# Altium PCB PCB2.PcbDoc
Units mil, origin at the board's own origin, x right, y up, seen from the top; angles counter-clockwise.
Board outline 4285 x 3120 mil, 4 copper layers (Top Layer, Layer 1, Layer 2, Bottom Layer), stack 64.008 mil thick; 26 components, 31 nets, 180 pads, 40 vias.
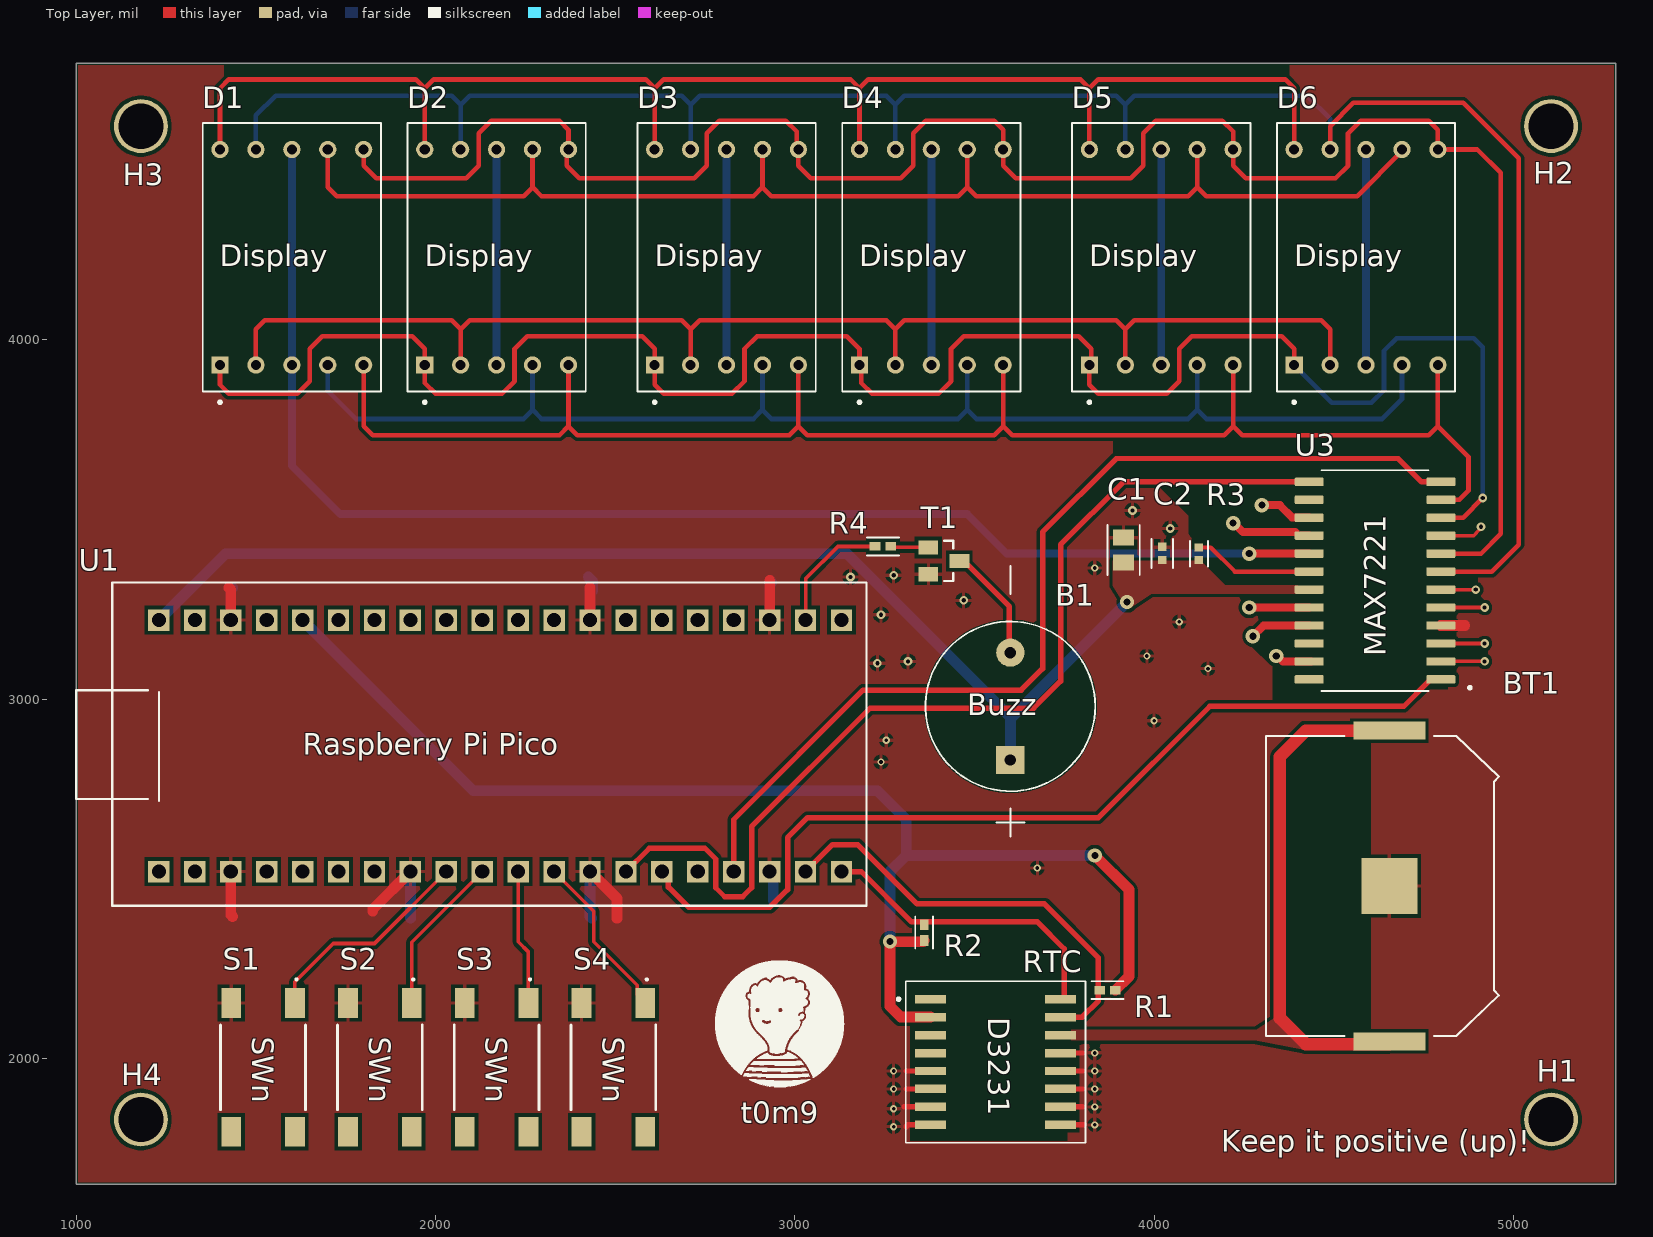
[diagram p0: Top Layer view]
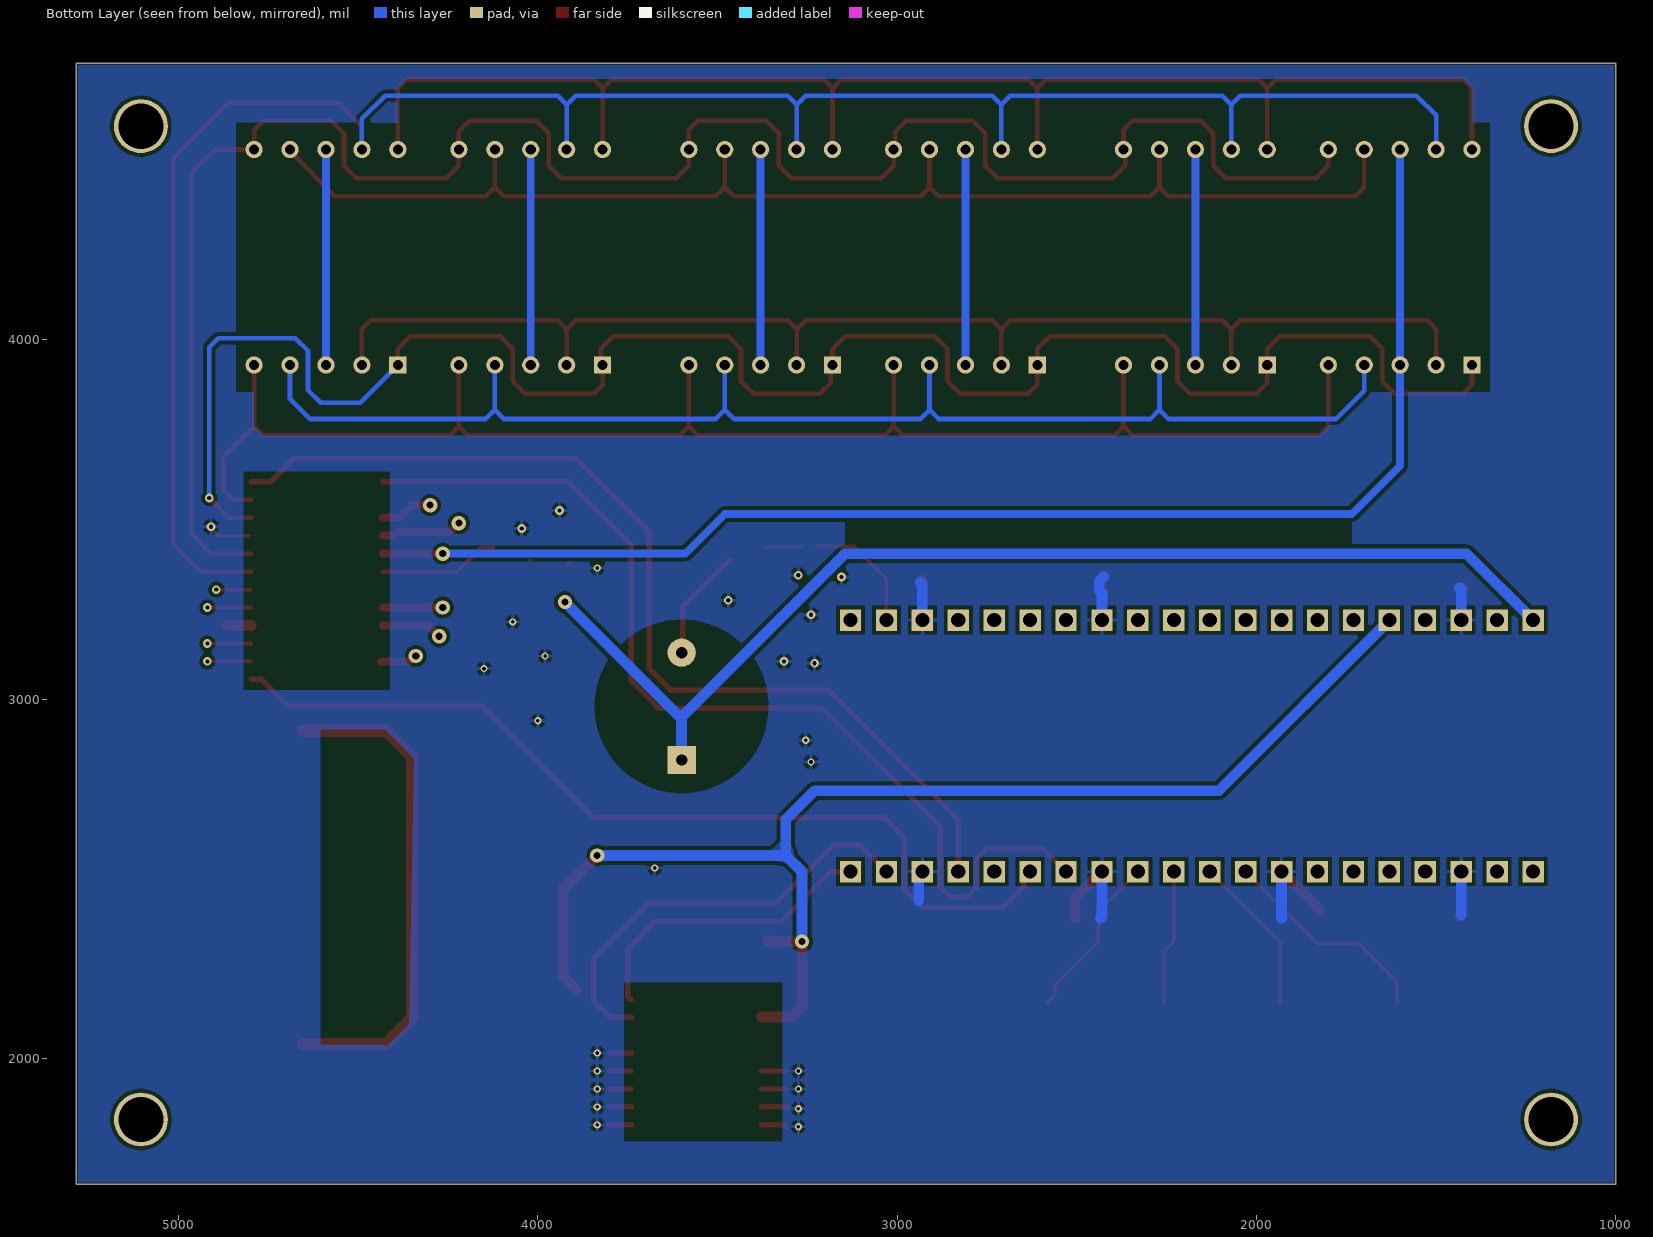
[diagram p1: Bottom Layer view, seen from below]
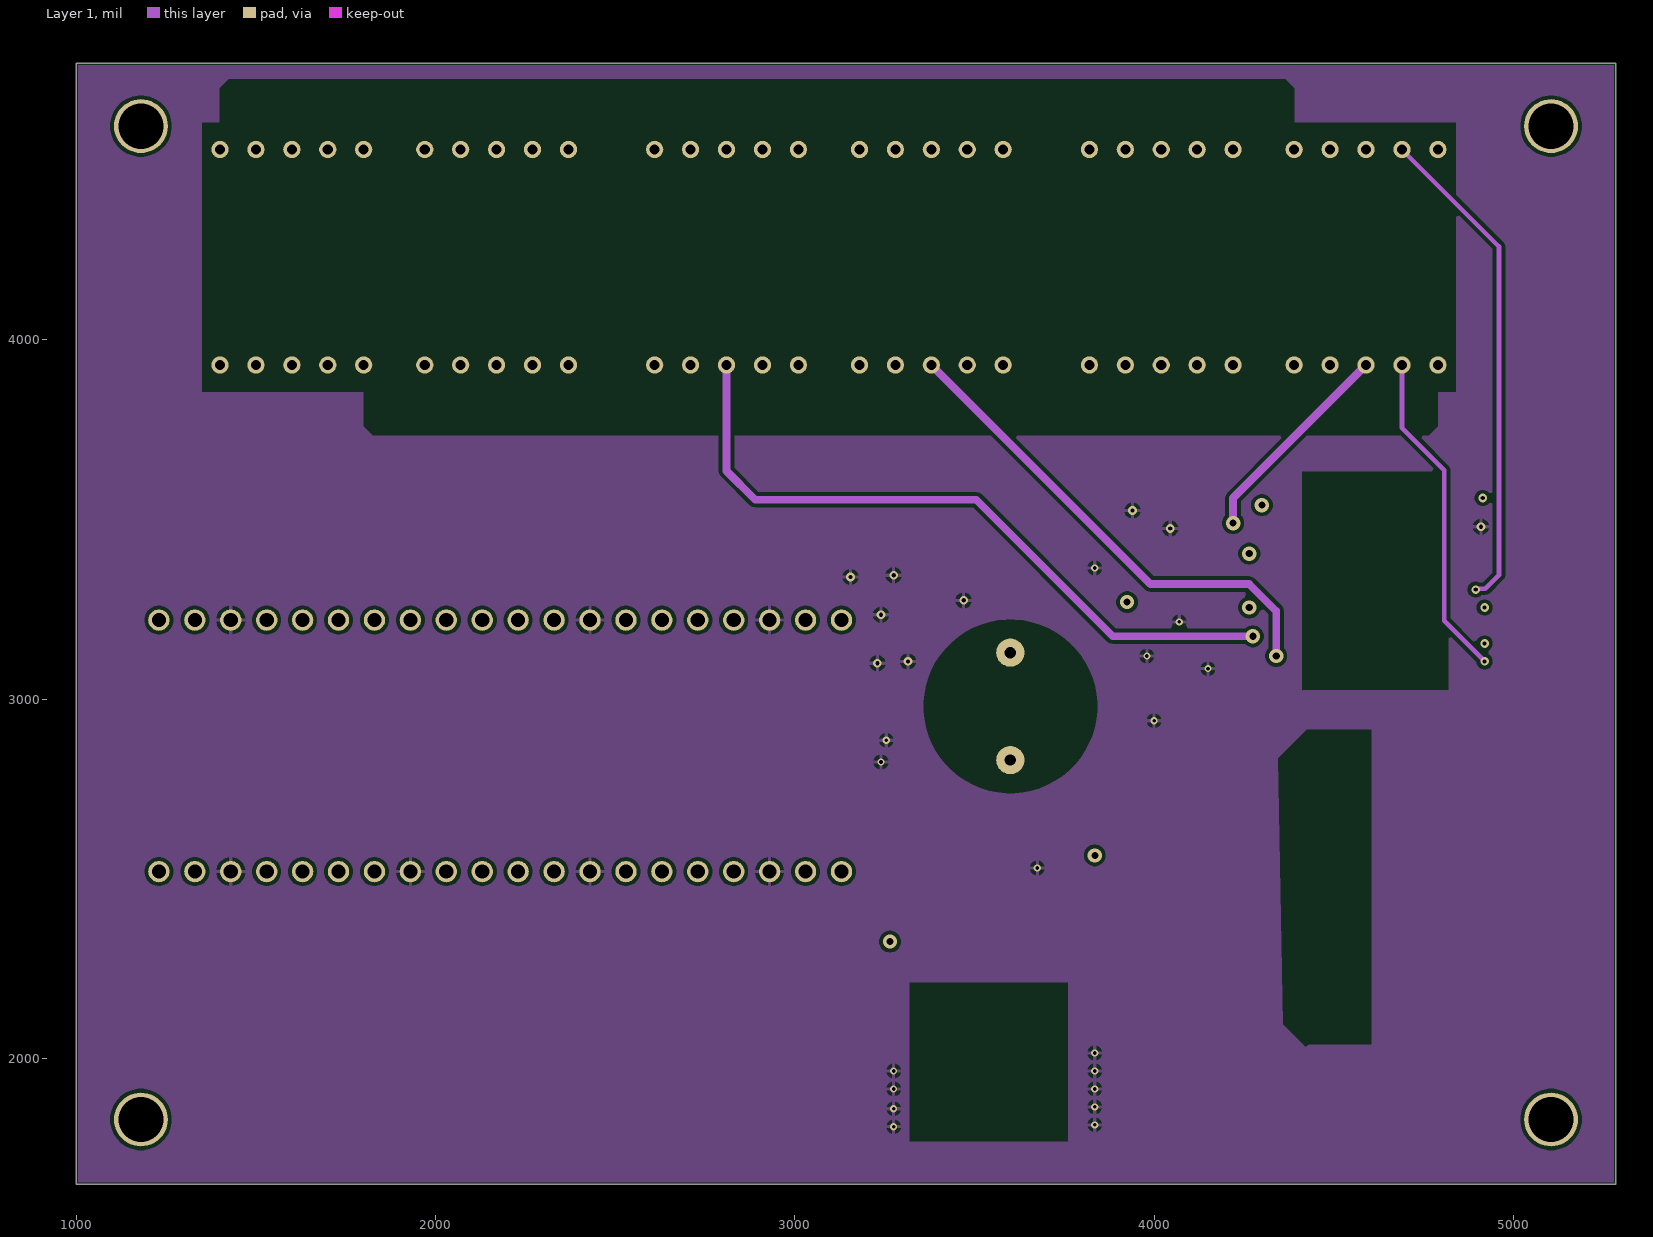
[diagram p2: Layer 1]
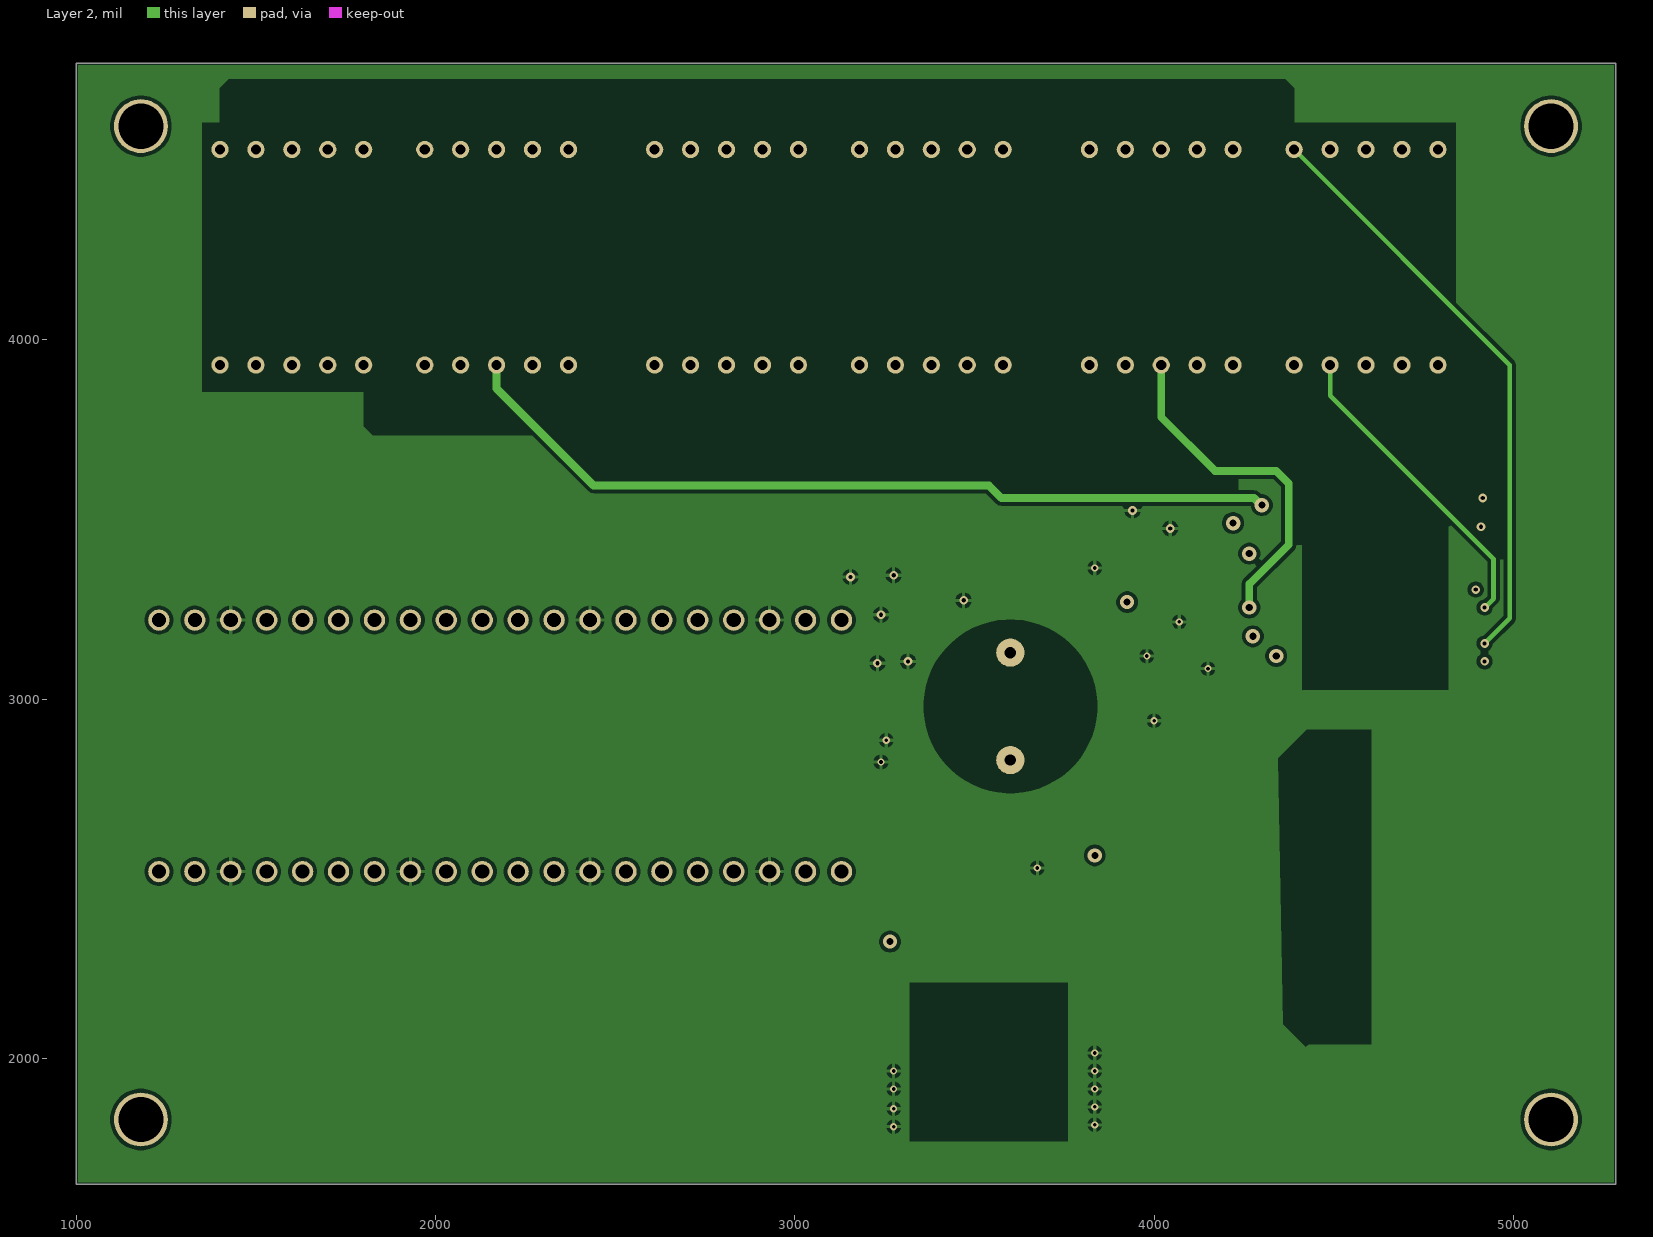
[diagram p3: Layer 2]

## Layer stack, top to bottom
Top Solder: solder mask 0.4, Solder Resist, Dk 3.5
Top Layer: signal copper 1.378
Dielectric 2: prepreg 8.2835, PP-006, Dk 4.1
Layer 1: signal copper 1.378
Dielectric 1: dielectric 41.9291, FR-4, Dk 4.8
Layer 2: signal copper 1.378
Dielectric 3: prepreg 8.2835, PP-006, Dk 4.1
Bottom Layer: signal copper 1.378
Bottom Solder: solder mask 0.4, Solder Resist, Dk 3.5

## Board outline
1000,1650 1000,4770 5285,4770 5285,1650 1120,1650

## Design rules (kind name [scope] priority, off if disabled: settings)
Clearance Clearance_1 [InNamedPolygon('9')] p1: gap=10 ignorepadtopadclearanceinfootprint=FALSE except(15: Arc-Poly Track-Poly SMDPad-Poly THPad-Poly Via-Poly Fill-Poly Poly-Poly)
Clearance [All] p2: gap=10 ignorepadtopadclearanceinfootprint=FALSE
PolygonConnect PolygonConnect_15 [InNetClass('All Nets') vs IsNamedPolygon('4')] p1: connectstyle=Direct reliefconductorwidth=10 reliefentries=4 polygonreliefangle="90 Angle" airgapwidth=10
PolygonConnect PolygonConnect_14 [All vs IsNamedPolygon('4')] p2: connectstyle=Direct reliefconductorwidth=10 reliefentries=4 polygonreliefangle="90 Angle" airgapwidth=10
PolygonConnect PolygonConnect_13 [All vs IsNamedPolygon('9')] p3: connectstyle=Direct reliefconductorwidth=10 reliefentries=4 polygonreliefangle="90 Angle" airgapwidth=10
PolygonConnect PolygonConnect_12 [All vs IsNamedPolygon('7')] p4: connectstyle=Direct reliefconductorwidth=10 reliefentries=4 polygonreliefangle="90 Angle" airgapwidth=10
PolygonConnect PolygonConnect_11 [All vs IsNamedPolygon('4')] p5: connectstyle=Direct reliefconductorwidth=10 reliefentries=4 polygonreliefangle="90 Angle" airgapwidth=10
PolygonConnect PolygonConnect_10 [All vs IsNamedPolygon('3')] p6: connectstyle=Relief reliefconductorwidth=10 reliefentries=4 polygonreliefangle="90 Angle" airgapwidth=10
PolygonConnect PolygonConnect_9 [All vs IsNamedPolygon('1')] p7: connectstyle=Direct reliefconductorwidth=10 reliefentries=4 polygonreliefangle="90 Angle" airgapwidth=10
PolygonConnect PolygonConnect_8 [All vs IsNamedPolygon('9')] p8: connectstyle=Relief reliefconductorwidth=10 reliefentries=4 polygonreliefangle="90 Angle" airgapwidth=10
PolygonConnect PolygonConnect_7 [All vs IsNamedPolygon('9')] p9: connectstyle=Direct reliefconductorwidth=10 reliefentries=4 polygonreliefangle="90 Angle" airgapwidth=10
PolygonConnect PolygonConnect_6 [All vs IsNamedPolygon('9')] p10: connectstyle=Relief reliefconductorwidth=10 reliefentries=4 polygonreliefangle="90 Angle" airgapwidth=10
PolygonConnect PolygonConnect_5 [All vs IsNamedPolygon('9')] p11: connectstyle=Direct reliefconductorwidth=10 reliefentries=4 polygonreliefangle="90 Angle" airgapwidth=10
PolygonConnect PolygonConnect_4 [All vs IsNamedPolygon('3')] p12: connectstyle=Direct reliefconductorwidth=10 reliefentries=4 polygonreliefangle="90 Angle" airgapwidth=10
PolygonConnect PolygonConnect_3 [All vs IsNamedPolygon('3')] p13: connectstyle=Direct reliefconductorwidth=10 reliefentries=4 polygonreliefangle="90 Angle" airgapwidth=10
PolygonConnect PolygonConnect_2 [All vs IsNamedPolygon('3')] p14: thpad.connectstyle=Relief thpad.reliefconductorwidth=10 thpad.reliefentries=4 thpad.polygonreliefangle="90 Angle" thpad.airgapwidth=10 smdpad.connectstyle=Relief smdpad.reliefconductorwidth=10 smdpad.reliefentries=4 smdpad.polygonreliefangle="90 Angle" smdpad.airgapwidth=10 via.connectstyle=Direct via.reliefconductorwidth=10 via.reliefentries=4 via.polygonreliefangle="90 Angle" via.airgapwidth=10
PolygonConnect PolygonConnect_1 [All vs IsNamedPolygon('3')] p15: thpad.connectstyle=Direct thpad.reliefconductorwidth=10 thpad.reliefentries=4 thpad.polygonreliefangle="90 Angle" thpad.airgapwidth=10 smdpad.connectstyle=Direct smdpad.reliefconductorwidth=10 smdpad.reliefentries=4 smdpad.polygonreliefangle="90 Angle" smdpad.airgapwidth=10 via.connectstyle=Relief via.reliefconductorwidth=10 via.reliefentries=4 via.polygonreliefangle="90 Angle" via.airgapwidth=10
PolygonConnect [All] p16: connectstyle=Relief reliefconductorwidth=10 reliefentries=4 polygonreliefangle="90 Angle" airgapwidth=10
RoutingVias [All] p1: holewidth=100 width=100 viastyle="Through Hole" minholewidth=10 minwidth=20 maxholewidth=200 maxwidth=250
SolderMaskExpansion [All] p1: expansion=4 istentingtop=FALSE
SupplyNets "Schematic Supply Nets" [InNet('GND')] p1: voltage=0.000
Width [All] p1: maxlimit=50 minlimit=10 preferedwidth=15 minimp=50.000000 maximp=50.000000 favimp=50.000000
30 further rules are at their usual default settings.

## Components (designator, comment, footprint, x,y, rotation, side; value= is the part's Value field where it differs from the comment)
B1 "CMI-1295-0585T" CMI-1295-0585T 3600,2980 r90 top
BT1 "Keystone 3034 BH" BAT_3034TR 4655,2480 r270 top
C1 "Electrolitic Capacitor 10uF" CAPC2012X145N 3915,3415 r90 top
C2 "UMK105B7104KVHF" UMK105B7104KVHF 4022.8,3405.46 r90 top
D1 "LED" LED_INND-TS56RAB 1600,4230 r90 top
D2 "LED" LED_INND-TS56RAB 2170,4230 r90 top
D3 "LED" LED_INND-TS56RAB 2810,4230 r90 top
D4 "LED" LED_INND-TS56RAB 3380,4230 r90 top
D5 "LED" LED_INND-TS56RAB 4020,4230 r90 top
D6 "LED" LED_INND-TS56RAB 4590,4230 r90 top
H1 "Tooling Hole" "TOOLING HOLE" 5105,1830 r0 top
H2 "Tooling Hole" "TOOLING HOLE" 5105,4595 r0 top
H3 "Tooling Hole" "TOOLING HOLE" 1180,4595 r0 top
H4 "Tooling Hole" "TOOLING HOLE" 1180,1830 r0 top
R1 "10k" "MR04X102 JTL" 3870,2190 r0 top
R2 "10k" "MR04X102 JTL" 3360,2350 r270 top
R3 "CRCW040221K0FKEDC" CRCW040221K0FKEDC 4125,3405 r270 top
R4 "MR04X102 JTL" "MR04X102 JTL" 3245,3425 r0 top
RTC "DS3231 RTC" "DS3231 RTC" 3558.9,1990 r270 top
S1 "TS04-66-70-BK-260-SMT" TS04-66-70-BK-260-SMT 1520,1975 r270 top
S2 "TS04-66-70-BK-260-SMT" TS04-66-70-BK-260-SMT 1845,1975 r270 top
S3 "TS04-66-70-BK-260-SMT" TS04-66-70-BK-260-SMT 2170,1975 r270 top
S4 "TS04-66-70-BK-260-SMT" TS04-66-70-BK-260-SMT 2495,1975 r270 top
T1 "2N7002" 2N7002 3415,3385 r270 top
U1 "RASPBERRY_PI_PICO" RASPBERRY_PI_PICO 2100,2875 r90 top
U3 "MAX7221" MAX7221 4615,3330 r180 top

## Footprints (in the part's own frame and the unit in brackets; to place one, negate y for a bottom-side part, rotate by r counter-clockwise, add the part's x,y. Pads: shape width x height; smd on the part's side, far side on the other; paste and mask are expansions set on the pad)
2N7002 [mm]
  rect 1x1.4 smd: 1(-0.95,-1.1) 2(0.95,-1.1) 3(0,1.1)
  silkscreen extent -1.42,0 1.42,0.66, body extent -1.46,-1.18 1.46,1.18, height 1.12
BAT_3034TR [mm]
  rect 1.27x5.08 smd: 1(-10.985,0) 1(10.985,0)
  rect 3.96x3.96 smd paste-3: 2(0,0)
  silkscreen extent -10.61,-8.73 10.61,7.74, body extent -11.62,-7.72 11.62,8.76, height 4.06
CAPC2012X145N [mm]
  rect 1.15x1.47 smd: 1(-0.88,0) 2(0.88,0)
  silkscreen extent -1.78,-1.14 1.78,1.14, body extent -1,-0.63 1,0.63, height 1.45
CMI-1295-0585T [mm]
  round 2 hole 0.8: N(3.8,0)
  rect 2x2 / inner round 2 / far side rect 2x2 hole 0.8: P(-3.8,0)
  silkscreen extent -9.22,-6 9.92,6, body extent -6,-6 6,6, height 9
CRCW040221K0FKEDC [mm]
  rect 0.56x0.6 smd: 1(-0.435,0) 2(0.435,0)
  silkscreen extent -0.89,-0.64 0.89,0.64, body extent -0.5,-0.25 0.5,0.25, height 0.35
"DS3231 RTC" [mm]
  rect 0.6x2.2 smd: 1(-4.445,-4.6) 2(-3.175,-4.6) 3(-1.905,-4.6) 4(-0.635,-4.6) 5(0.635,-4.6) 6(1.905,-4.6) 7(3.175,-4.6) 8(4.445,-4.6) 9(4.445,4.6) 10(3.175,4.6) 11(1.905,4.6) 12(0.635,4.6) 13(-0.635,4.6) 14(-1.905,4.6) 15(-3.175,4.6) 16(-4.445,4.6)
  silkscreen extent -5.72,-6.96 5.72,6.35, body extent -5.15,-5.16 5.15,5.16, height 2.65
LED_INND-TS56RAB [mm]
  rect 1.218x1.218 / inner round 1.218 / far side rect 1.218x1.218 hole 0.71: 1(-7.62,5.08)
  round 1.218 hole 0.71: 2(-7.62,2.54) 3(-7.62,0) 4(-7.62,-2.54) 5(-7.62,-5.08) 6(7.62,-5.08) 7(7.62,-2.54) 8(7.62,0) 9(7.62,2.54) 10(7.62,5.08)
  silkscreen extent -10.35,-6.3 9.5,6.3, body extent -9.5,-6.3 9.5,6.3, height 8
MAX7221 [mm]
  rrect25% 2.05x0.59 smd: 1(-4.655,6.985) 2(-4.655,5.715) 3(-4.655,4.445) 4(-4.655,3.175) 5(-4.655,1.905) 6(-4.655,0.635) 7(-4.655,-0.635) 8(-4.655,-1.905) 9(-4.655,-3.175) 10(-4.655,-4.445) 11(-4.655,-5.715) 12(-4.655,-6.985) 13(4.655,-6.985) 14(4.655,-5.715) 15(4.655,-4.445) 16(4.655,-3.175) 17(4.655,-1.905) 18(4.655,-0.635) 19(4.655,0.635) 20(4.655,1.905) 21(4.655,3.175) 22(4.655,4.445) 23(4.655,5.715) 24(4.655,6.985)
  silkscreen extent -6.81,-7.8 3.8,7.8, body extent -5.16,-7.7 5.16,7.7, height 2.65
"MR04X102 JTL" [mm] "1k 0402"
  rect 0.75x0.6 smd: 1(-0.55,0) 2(0.55,0)
  silkscreen extent -1.14,-0.64 1.14,0.64, body extent -0.5,-0.25 0.5,0.25, height 0.4
RASPBERRY_PI_PICO [mil]
  rect 59.37x59.37 / inner round 59.37 / far side rect 59.37x59.37 hole 39.37: 3V3(345,470) 3V3_EN(345,570) ADC_VREF(345,370) AGND(345,170) GND(345,670) GND2(345,-330) GND3(345,-830) GND4(-355,670) GND5(-355,170) GND6(-355,-330) GND7(-355,-830) GP0(-355,870) GP1(-355,770) GP2(-355,570) GP3(-355,470) GP4(-355,370) GP5(-355,270) GP6(-355,70) GP7(-355,-30) GP8(-355,-130) GP9(-355,-230) GP10(-355,-430) GP11(-355,-530) GP12(-355,-630) GP13(-355,-730) GP14(-355,-930) GP15(-355,-1030) GP16(345,-1030) GP17(345,-930) GP18(345,-730) GP19(345,-630) GP20(345,-530) GP21(345,-430) GP22(345,-230) GP26_A0(345,-30) GP27_A1(345,70) GP28_A2(345,270) RUN(345,-130) VBUS(345,870) VSYS(345,770)
  silkscreen extent -450,-1100 450,1100, body extent -418,-1084 408,975, height 249
"TOOLING HOLE" [mm]
  round 3.81 hole 3.2: 10(0,0)
TS04-66-70-BK-260-SMT [mm] "SMD button"
  rect 2.1x1.4 smd: 1(-4.55,2.25) 2(-4.55,-2.25) 3(4.55,2.25) 4(4.55,-2.25)
  silkscreen extent -6.27,-3 3,3, body extent -4.97,-3 5.03,3, height 7
UMK105B7104KVHF [mm]
  rect 0.6x0.62 smd: 1(-0.46,0) 2(0.46,0)
  silkscreen extent -1.02,-0.76 1.02,0.76, body extent -0.5,-0.28 0.5,0.27, height 0.5

## Part data
B1: "Buzzer", ComponentLink1Description="New link"
C1: "CGA4J1X7R0J106K125AC  /  / 10u 6.3V 0805"
C2: "0.1uF"
D1 D2 D3 D4 D5 D6: "VQB-71"
R1 R2: library part ESR01MZPF1002
R3: "21k"
R4: "1k"
S1 S2 S3 S4: "50mA 12VDC", ComponentLink1Description="New link", ComponentLink1URL=https://www.mouser.pl/ProductDetail/Same-Sky/TS04-66-70-BK-260-SMT?qs=A6eO%252BMLsxmRC7sCjYvfBWA%3D%3D&mgh=1&vip=1&utm_id=20540008314&utm_source=google&utm_medium=cpc&utm_marketing_tactic=emeacorp&gad_source=1&gad_campaignid=20549663743&gbraid=0AAAAADn_wf3exhVZw2lg0M8R4AHAX7JAt&gclid=Cj0KCQjw9JLHBhC-ARIsAK4PhcrY2_4ccHUHvV6ZUo_WOC_S4ttDTQDRDZOP9uDgYmQccfZ3msk1KAwaApw5EALw_wcB
T1: "Transistor", ComponentLink1Description="New link", ComponentLink1URL=https://eu.mouser.com/ProductDetail/Vishay-Siliconix/2N7002-T1-E3?qs=jcx%252B0HVgj2Z1J1ac9Hiotg%3D%3D&utm_id=22436684815&utm_source=google&utm_medium=cpc&utm_marketing_tactic=emeacorp&gad_source=1&gad_campaignid=22426729329&gbraid=0AAAAADn_wf1Do64Tw2aIrXe33zOqTl_Om&gclid=Cj0KCQjwl5jHBhDHARIsAB0Yqjw-ZGSpO3dx2dSvGBMt7_r144avYgoIM5zojlC5lH09VKLSqUlBBdAaArJKEALw_wcB
U1: "Raspberry Pi Board, Arm Cortex-M0+; Core Architecture:Arm; Core Sub-Architecture:Cortex-M0+; Kit Contents:Raspberry Pi Pico Board; No. Of Bits:32Bit; Silicon Core Number:Rp2040; Silicon Manufacturer:Raspberry Pi", Package=None, Check_prices=https://www.snapeda.com/parts/RASPBERRY%20PI%20PICO/Raspberry+Pi/view-part/?ref=eda, MF="Raspberry Pi", MP="RASPBERRY PI PICO", SnapEDA_Link=https://www.snapeda.com/parts/RASPBERRY%20PI%20PICO/Raspberry+Pi/view-part/?ref=snap

## Via types
v1: diameter 20, hole 10, Top Layer to Bottom Layer, 17 vias
v2: diameter 24, hole 12, Top Layer to Bottom Layer, 14 vias
v3: diameter 40, hole 20, Top Layer to Bottom Layer, 6 vias
v4: diameter 39.37, hole 19.68, Top Layer to Bottom Layer, 3 vias

## Nets (pads, with @x,y where several pads share a name; then routed paths per layer and width w, separated by ;. In a path a pad name is that pad's centre, name@x,y a point inside that pad or via, vN(x,y) a via of type N, cw(c..) or ccw(c..) an arc to the next point about the centre after c; other vN are vias at no path point)
3V3: R1.2 R2.2 RTC.2 U1.3V3 | length 3626.5
  Top Layer w10: 3266.69,2143.31 3267.5,2142.5
  Top Layer w30: R2.2 3356.65,2325 v4(3265,2325) 3265,2145 3267.5,2142.5 3295,2115 RTC.2 ; v4(3835,2565) 3930,2470 3930,2228.35 R1.2
  Bottom Layer w30: U1.3V3 2105,2745 3230,2745 3310,2665 3310,2565 ; v4(3265,2325) 3265,2520 3310,2565 ; v4(3835,2565) 3310,2565
BUZZER: R4.1 U1.GP17 | length 345.6
  Top Layer w10: U1.GP17 3030,3335 3120,3425 R4.1
CONFIRM: S3.1 U1.GP8 | length 377.7
  Top Layer w10: U1.GP8 2230,2325 2258.58,2296.42 S3.1
CYCLE_MODES: S4.1 U1.GP9 | length 470.9
  Top Layer w10: U1.GP9 2440,2410 2440,2325 2561.02,2203.98 2561.02,2176.69 S4.1
DIG_0: D1.3 D1.8 U3.17 | length 3813.2
  Top Layer w22: v3(4265,3405) U3.17
  Bottom Layer w22: D1.8 D1.3 1600,3650 1735,3515 3480,3515 3590,3405 v3(4265,3405)
DIG_1: D2.3 D2.8 U3.15 | length 3075.8
  Top Layer w22: v3(4300,3540) 4350,3540 4384.39,3505.61 4431.12,3505.61 U3.15
  Layer 2 w22: D2.3 2170,3865 2440,3595 3540,3595 3575,3560 4278.11,3560 4298.11,3540 v3(4300,3540)
  Bottom Layer w22: D2.3 D2.8
DIG_2: D3.3 D3.8 U3.21 | length 2719.7
  Top Layer w22: v3(4275,3175) 4305,3205 U3.21
  Layer 1 w22: D3.3 2810,3635 2890,3555 3505,3555 3885,3175 v3(4275,3175)
  Bottom Layer w22: D3.3 D3.8
DIG_3: D4.3 D4.8 U3.23 | length 2071.7
  Top Layer w22: v3(4340,3120) 4343.25,3120 4358.25,3105 U3.23@4436.73,3105
  Layer 1 w22: D4.3 3990,3320 4265,3320 4340,3245 v3(4340,3120)
  Bottom Layer w22: D4.3 D4.8
DIG_4: D5.3 D5.8 U3.20 | length 1733.9
  Top Layer w22: v3(4265,3255) U3.20
  Layer 2 w22: D5.3 4020,3785 4170,3635 4340,3635 4375,3600 4375,3430 4265,3320 v3(4265,3255)
  Bottom Layer w22: D5.3 D5.8
DIG_5: D6.3 D6.8 U3.16 | length 1419.5
  Top Layer w22: v3(4220,3490) 4222.13,3490 4247.13,3465 4392.99,3465 4402.99,3455 U3.16
  Layer 1 w22: v3(4220,3490) 4220,3560 D6.3
  Bottom Layer w22: D6.3 D6.8
GND: BT1.2 C1.2 C2.2 RTC.5 RTC.6 RTC.7 RTC.8 RTC.9 RTC.10 RTC.11 RTC.12 RTC.13 S1.2 S2.2 S3.2 S4.2 T1.2 U1.GND U1.GND2 U1.GND3 U1.GND4 U1.GND5 U1.GND6 U1.GND7 U3.4 U3.9 | length 2301.1
  Top Layer w10: U3.9@4803.27,3455 4889.74,3455 4896.82,3462.07 4896.82,3463.03 4910,3476.21 v2(4910,3480)
  Top Layer w15: 3305,1865 RTC.7 ; 3310,1810 3315,1815 RTC.8 ; 3310,1915 RTC.6 ; 3310,1965 RTC.5 ; RTC.9 3805,1815 ; RTC.10 3800,1865 ; RTC.11 3800,1915 ; RTC.12 3800,1965 ; RTC.13 3800,2015
  Top Layer w30: 1425,3310 1430,3305 U1.GND ; U1.GND4 1430,2400 1435,2395 ; 1825,2410 1825,2415 U1.GND5 ; U1.GND6 2505,2445 2505,2390 ; U1.GND2 2430,3310 ; U1.GND7 U1.GND7@2932.5,2517.5 ; U1.GND3 2930,3330 ; U3.4 4865,3205
  Bottom Layer w30: 1430,2400 U1.GND4 ; U1.GND 1430,3305 1435,3310 ; 1930,2390 U1.GND5 ; 2425,3340 2437.57,3327.43 2437.57,3302.57 2430,3295 U1.GND2 ; U1.GND6 2430,2395 2435,2390 ; U1.GND7 2940,2510 2940,2439.64 ; U1.GND3 2930,3320 2935,3325
  other v1: 3275,1810 3835,1815 3275,1860 3835,1865 3275,1915 3835,1915 3275,1965 3835,1965 3835,2015 3675,2530 3240,2825 3254.45,2885.55 4000,2940 4150,3085 3980,3120 4070,3215 3835,3365
  other v2: 3230,3100 3315,3105 3240,3235 3470,3275 3155,3340 3275,3345 4045,3475 3940,3525
NetB1_N: B1.N T1.3 | length 316.5
  Top Layer w15: T1.3@3466.44,3388.56 3466.44,3384.74 3478.37,3372.81 3482.19,3372.81 3597.31,3257.69 3597.31,3132.3 B1.N
NetBT1_1: BT1.1 RTC.14 | length 1397.6
  Top Layer w35: BT1.1@4655,2040 4422.48,2040 4350,2112.48 4350,2480 4350,2840 4422.48,2912.48 BT1.1@4655,2912.48
NetR3_1: R3.1 U3.18 | length 334.5
  Top Layer w12: R3.1 4157.87,3422.13 4225,3355 U3.18
NetR4_2: R4.2 T1.1 | length 106.1
  Top Layer w10: R4.2 3269.25,3422.4 T1.1
RTC_SCL: R2.1 RTC.16 U1.GP15 | length 855.1
  Top Layer w15: U1.GP15 3185,2520 3325,2380 3675,2380 3750,2305 3750,2171.81 3743.19,2165 RTC.16
RTC_SDA: R1.1 RTC.15 U1.GP14 | length 1220.2
  Top Layer w15: U1.GP14 3105,2595 3175,2595 3340,2430 3695,2430 3845,2280 3845,2190 3845,2160 3800,2115 RTC.15
SEG_A: D1.4 D2.4 D3.4 D4.4 D5.4 D6.4 U3.2 | length 4836.8
  Top Layer w10: U3.2 v2(4920,3105)
  Layer 1 w13: D6.4 4690,3755 4807.29,3637.71 4807.29,3217.71 v2(4920,3105)
  Bottom Layer w13: D1.4 1700,3858.28 1778.28,3780 2245,3780 2270,3805 ; D2.4 2270,3805 ; D3.4 2910,3805 ; D4.4 3480,3805 ; D5.4 4120,3805 ; D6.4 4690,3835 4635,3780 4145,3780 4120,3805 ; 2270,3805 2295,3780 2885,3780 2910,3805 ; 2910,3805 2935,3780 3455,3780 3480,3805 ; 3480,3805 3505,3780 4095,3780 4120,3805
SEG_B: D1.5 D2.5 D3.5 D4.5 D5.5 D6.5 U3.11 | length 4415.8
  Top Layer w13: D1.5 1800,3760 1825,3735 2345,3735 2370,3760 ; D2.5 2370,3760 ; D3.5 3010,3760 ; D4.5 3580,3760 ; D5.5 4220,3760 ; D6.5 4790,3760 ; U3.11 4850,3555 4875,3580 4875,3675 4790,3760 ; 2370,3760 2395,3735 2985,3735 3010,3760 ; 3010,3760 3035,3735 3555,3735 3580,3760 ; 3580,3760 3605,3735 4195,3735 4220,3760 ; 4220,3760 4245,3735 4765,3735 4790,3760
SEG_C: D1.7 D2.7 D3.7 D4.7 D5.7 D6.7 U3.6 | length 5110.1
  Top Layer w10: U3.6 v2(4895,3305)
  Top Layer w13: D1.7@1700,4525 1700,4425 1725,4400 2245,4400 2270,4425 ; D2.7@2270,4525 2270,4425 ; D3.7@2910,4525 2910,4425 ; D4.7@3480,4525 3480,4425 ; D5.7@4120,4525 4120,4425 ; D6.7@4690,4525 4565,4400 4145,4400 4120,4425 ; 2270,4425 2295,4400 2885,4400 2910,4425 ; 2910,4425 2935,4400 3455,4400 3480,4425 ; 3480,4425 3505,4400 4095,4400 4120,4425
  Layer 1 w13: D6.7 4960,4260 4960,3345 4922,3307 4897,3307 v2(4895,3305)
SEG_D: D1.9 D2.9 D3.9 D4.9 D5.9 D6.9 U3.7 | length 5806.5
  Top Layer w13: D6.9 4490,4595 4555,4660 4860,4660 5015,4505 5015,3430 4940,3355 U3.7
  Bottom Layer w13: D1.9 1500,4625 1555,4680 2045,4680 2070,4655 ; D2.9 2070,4655 ; D3.9 2710,4655 ; D4.9 3280,4655 ; D5.9 3920,4655 ; D6.9 4490,4615 4425,4680 3945,4680 3920,4655 ; 2070,4655 2095,4680 2685,4680 2710,4655 ; 2710,4655 2735,4680 3255,4680 3280,4655 ; 3280,4655 3305,4680 3895,4680 3920,4655
SEG_DP: D1.6 D2.6 D3.6 D4.6 D5.6 D6.6 U3.8 | length 5604.8
  Top Layer w13: D1.6 1800,4485 1835,4450 2085,4450 2120,4485 2120,4575 2155,4610 2345,4610 2370,4585 D2.6 ; D2.6@2365,4530 2365,4485 2400,4450 2720,4450 2755,4485 2755,4575 2790,4610 2975,4610 3005,4580 D3.6@3005,4525 ; D3.6 3010,4485 3045,4450 3295,4450 3330,4485 3330,4575 3365,4610 3555,4610 3580,4585 D4.6 3580,4485 3615,4450 3935,4450 3970,4485 3970,4575 4005,4610 4190,4610 4220,4580 4220,4485 4255,4450 4505,4450 4540,4485 4540,4575 4575,4610 4765,4610 4790,4585 D6.6 4900,4530 4965,4465 4965,3460 4910,3405 U3.8
SEG_E: D1.10 D2.10 D3.10 D4.10 D5.10 D6.10 U3.3 | length 5887.8
  Top Layer w10: U3.3 v2(4920,3155)
  Top Layer w13: D1.10 1400,4700 1425,4725 1945,4725 1970,4700 ; D2.10 1970,4700 ; D3.10 2610,4700 ; D4.10 3180,4700 ; D5.10 3820,4700 ; D6.10 4390,4700 4365,4725 3845,4725 3820,4700 ; 1970,4700 1995,4725 2585,4725 2610,4700 ; 2610,4700 2635,4725 3155,4725 3180,4700 ; 3180,4700 3205,4725 3795,4725 3820,4700
  Layer 2 w13: D6.10 4990,3930 4990,3225 v2(4920,3155)
SEG_F: D1.1 D2.1 D3.1 D4.1 D5.1 D6.1 U3.10 | length 5485.7
  Top Layer w13: D1.1 1400,3875 1425,3850 1615,3850 1650,3885 1650,3975 1685,4010 1935,4010 1970,3975 D2.1 1970,3880 2000,3850 2185,3850 2220,3885 2220,3975 2255,4010 2575,4010 2610,3975 D3.1 2610,3875 2635,3850 2825,3850 2860,3885 2860,3975 2895,4010 3145,4010 3180,3975 D4.1 ; D4.1@3185,3935 3185,3880 3215,3850 3400,3850 3435,3885 3435,3975 3470,4010 3790,4010 3825,3975 D5.1@3825,3930 ; D5.1 3820,3875 3845,3850 4035,3850 4070,3885 4070,3975 4105,4010 4355,4010 4390,3975 D6.1 ; U3.10 4860,3505 v2(4915,3560)
  Bottom Layer w13: D6.1 4495,3825 4605,3825 4640,3860 4640,3970 4675,4005 4890,4005 4915,3980 v2(4915,3560)
SEG_G: D1.2 D2.2 D3.2 D4.2 D5.2 D6.2 U3.5 | length 4689.1
  Top Layer w10: U3.5 v2(4920,3255)
  Top Layer w13: D1.2 1500,4030 1525,4055 2045,4055 2070,4030 ; D2.2 2070,4030 ; D3.2 2710,4030 ; D4.2 3280,4030 ; D5.2 3920,4030 ; D6.2 4490,4030 4465,4055 3945,4055 3920,4030 ; 2070,4030 2095,4055 2685,4055 2710,4030 ; 2710,4030 2735,4055 3255,4055 3280,4030 ; 3280,4030 3305,4055 3895,4055 3920,4030
  Layer 2 w13: D6.2 4490,3845 4945,3390 4945,3280 v2(4920,3255)
SET_BRGH: S1.1 U1.GP6 | length 607.8
  Top Layer w10: S1.1 1608.58,2213.58 1715,2320 1830,2320 U1.GP6
SET_TIME: S2.1 U1.GP7 | length 447.2
  Top Layer w10: S2.1 1933.58,2323.58 U1.GP7
SPI_CS: U1.GP13 U3.12 | length 2779.1
  Top Layer w15: U1.GP13 2830,2665 3190,3025 3630,3025 3690,3085 3690,3465 3895,3670 4679.29,3670 4744.29,3605 U3.12
SPI_MOSI: U1.GP11 U3.1 | length 2572.4
  Top Layer w15: U1.GP11 2648.09,2501.91 2648.09,2476.91 2705,2420 2930,2420 2980,2470 2980,2614.64 3035.36,2670 3845,2670 4155,2980 4695,2980 4762.91,3047.91 4762.91,3048.39 4769.53,3055 U3.1
SPI_SCK: U1.GP10 U3.13 | length 2832.1
  Top Layer w15: U1.GP10 2595.03,2585.03 2749.97,2585.03 2780,2555 2780,2475 2805,2450 2855,2450 2880,2475 2880,2645 3210,2975 3665,2975 3740,3050 3740,3430 3915,3605 U3.13
VBUS: B1.P C1.1 C2.1 R3.2 U1.VBUS U3.19 | length 3225.8
  Top Layer w10: C1.1@3910,3380.35 C1.1@3917.54,3372.82 ; C2.1@4022.4,3387.35 C2.1
  Top Layer w30: v4(3925,3270) v4@3927.54,3270
  Bottom Layer w10: 3600,2950 3605,2950
  Bottom Layer w30: U1.VBUS 1415,3405 3145,3405 3600,2950 B1.P ; 3605,2950 v4(3925,3270)
pads on no net: H1.10 H2.10 H3.10 H4.10 RTC.1 RTC.3 RTC.4 S1.3 S1.4 S2.3 S2.4 S3.3 S3.4 S4.3 S4.4 U1.3V3_EN U1.ADC_VREF U1.AGND U1.GP0 U1.GP1 U1.GP2 U1.GP3 U1.GP4 U1.GP5 U1.GP12 U1.GP16 U1.GP18 U1.GP19 U1.GP20 U1.GP21 U1.GP22 U1.GP26_A0 U1.GP27_A1 U1.GP28_A2 U1.RUN U1.VSYS U3.14 U3.22 U3.24

## Polygon pours and split planes (outlines as drawn)
GND on Top Layer "3" (solid, pour order 14): 1005,1655 5280,1655 5280,4765 1005,4765
VBUS on Top Layer "1" (solid, pour order 0): 3910,3270 3915,3255 3935,3255 3993.4,3293.4 4400,3293.4 4400,3316.45 4196.81,3318.19 4130.41,3384.59 3885,3384.59 3885,3315 3910,3275
NetBT1_1 on Top Layer "4" (solid, pour order 3): 3770,2080 3770,2050 4280.87,2050 4455.97,2016.81 4347.64,2119.76 4283.75,2080 4245,2080
GND on Bottom Layer "8" (solid, pour order 16): 1005,1655 5280,1655 5280,4765 1005,4765
3V3 on Bottom Layer "7" (solid, pour order 8): 3325,2605 3370,2560 3315,2545 3280,2530 3290,2580 3300,2605
GND on Layer 1 "5" (solid, pour order 13): 1005,1655 5280,1655 5280,4765 1005,4765
GND on Layer 2 "6" (solid, pour order 15): 1005,1655 5280,1655 5280,4765 1005,4765

## Other copper
Top Layer:
  pour cut-out: 2830,2550 2870,2550 2880,2560 2880,2645 3210,2975 3210.93,2974.07 3358.7,2974.07 3358.7,3022.44 3361.26,3025 3190,3025 2830,2665
  pour cut-out: 2655,2575 2648.09,2568.09 2648.09,2476.91 2705,2420 2817.5,2420 2817.5,2447.5 2690,2575
  pour cut-out: 3295,2115 3800,2115 3845,2160 3845,2280 3695,2430 3340,2430 3175,2595 3175,2530 3325,2380 3325,2339.17 3310.83,2325 3265,2325 3265,2145 3300,2110 3305,2110
  pour cut-out: 4095,3460 4095,3590 4390,3590 4390,3500 4245,3355 4160,3440 4110,3440
  pour cut-out: 1400,4700 1410,4710 1410,4795 4360,4795 4380,4775 4377.5,4772.5 4377.5,4712.5
  pour cut-out: 4835,3340 4835,3249.7 4840.32,3244.38 4840.53,3244.59 4903,3244.59 4903,3339.12 4899.69,3342.43
  pour cut-out: 4328.48,3095.19 4328.48,2991.52 4340,2980 4695,2980 4745,3030 4700,3075 4660,3075
  pour cut-out: 4015,3590 4105,3500 4105,3590
  pour cut-out: 3885,3735 3885,3680 3895,3670 4679.29,3670 4749.29,3600 4865,3600 4865,3665 4875,3675 4810,3740 4810,3745 4735,3745 4725,3755 4720,3750 4305,3750 4295,3760
  pour cut-out: 3690,3215 3690,3465 3895,3670 4675,3670 4720,3625 4485,3625 4465,3605 3915,3605 3740,3430 3740,3200
  pour cut-out: 4525,4600 4525,4630 4555,4660 4860,4660 5015,4505 5015,3430 4935,3350 4840,3350 4840,3430 4935,3525 4935,3665
  pour cut-out: 4790,3845 4790,3760 4890,3660 4890,3550 4955,3550 4965,3560 4965,4465 4900,4530 4895,4525 4820,4525
  pour cut-out: 4932.93,3562.65 4934.05,3563.77 4953.58,3563.77 4953.58,3465.68 4907.78,3419.89 4838.2,3419.89 4838.2,3478.7 4851.44,3491.94 4863.56,3491.94 4934.72,3563.1 4934.95,3563.1
  pour cut-out: 4256.58,3150.99 4266.58,3150.99 4321.58,3095.99 4345.59,3120 4410,3120 4410,3170 4390,3190 4388.29,3188.29 4308.29,3188.29 4285,3165
  pour cut-out: 4150,3405 4150,3372.61 4197.1,3325.5 4383.47,3325.5 4384.57,3324.4 4384.57,3341.09 4382.56,3343.11 4225.9,3343.11 4182.8,3386.22 4178.21,3386.22 4158.58,3405.85 4157.85,3405.11 4151.98,3405.11
Layer 2:
  pour cut-out: 4230,3635 4235,3630 4235,3560 3575,3560 3540,3595 2440,3595 2170,3865 4027.5,3865 4032.5,3870
  pour cut-out: 4375,3430 4485,3430 4685,3630 4700,3630 4470,3860 4470,3870 4032.5,3870 4020,3857.5 4035,3842.5 4035,3770 4170,3635 4340,3635 4375,3600
  pour cut-out: 4485,3875 4505,3855 4505,3825 4950,3380 4960,3390 4990,3390 4990,3930 4845,4075 4845,4080
Bottom Layer:
  pour cut-out: 1735,3515 1735,3400 3140,3400 3145,3405 3145,3520
Multi-Layer:
  pour cut-out: 3358.7,2980 ccw(c3600,2980) 3600,2738.7 ccw(c3600,2980) 3841.3,2980 ccw(c3600,2980) 3600,3221.3 ccw(c3600,2980)
  pour cut-out: 4605,2915 4425,2915 4345,2835 4359.67,2094.67 4374.34,2080 4422.34,2032 4430.34,2040 4605,2040 4605,2300 4605,2315 4595,2305 4605,2315
  pour cut-out: 1800,3870 1800,3760 1825,3735 4765,3735 4790,3760 4790,3875
  pour cut-out: 1400,4570 1400,4700 1425,4725 4365,4725 4390,4700 4390,4585
  pour cut-out: 3320,2210 3320,1770 3760,1770 3760,2210
  pour cut-out: 1350,4605 4840,4605 4840,3855 1350,3855
  pour cut-out: 4411.78,3633.18 4411.78,3025.7 4412.03,3025.45 4413.26,3026.67 4818.44,3026.67 4818.44,3631.71 4816.75,3633.39 4411.7,3633.39

## Silkscreen, mask and mechanical layers (free items; w line width, h text height)
Top Overlay:
  drawing of 7 lines, arcs and shapes, not listed
  text "t0m9" at 2850,1820 h60
Board Shape:
  lines w20: 1000,1650 5285,1650 5285,4770 1000,4770 1000,1650

## Text inside footprints (layer, text, board x,y; h text height)
B1: Top Overlay "Buzz" at 3480,2955 h60
BT1: Top Overlay "Keep it positive (up)!" at 4187.5,1740 h60
D1: Top Overlay "Display" at 1400,4204.99 h60
D2: Top Overlay "Display" at 1970,4204.99 h60
D3: Top Overlay "Display" at 2610,4204.99 h60
D4: Top Overlay "Display" at 3180,4204.99 h60
D5: Top Overlay "Display" at 3820,4204.99 h60
D6: Top Overlay "Display" at 4390,4204.99 h60
RTC: Top Overlay "D3231" at 3538.9,2115 h60 r270
S1: Top Overlay "SWn" at 1490,2060 h60 r270
S2: Top Overlay "SWn" at 1815,2060 h60 r270
S3: Top Overlay "SWn" at 2140,2060 h60 r270
S4: Top Overlay "SWn" at 2465,2060 h60 r270
U1: Top Overlay "Raspberry Pi Pico" at 1630,2844.99 h60